# EAGLE board TLC5928_Breakout_Board (EAGLE 6.3)
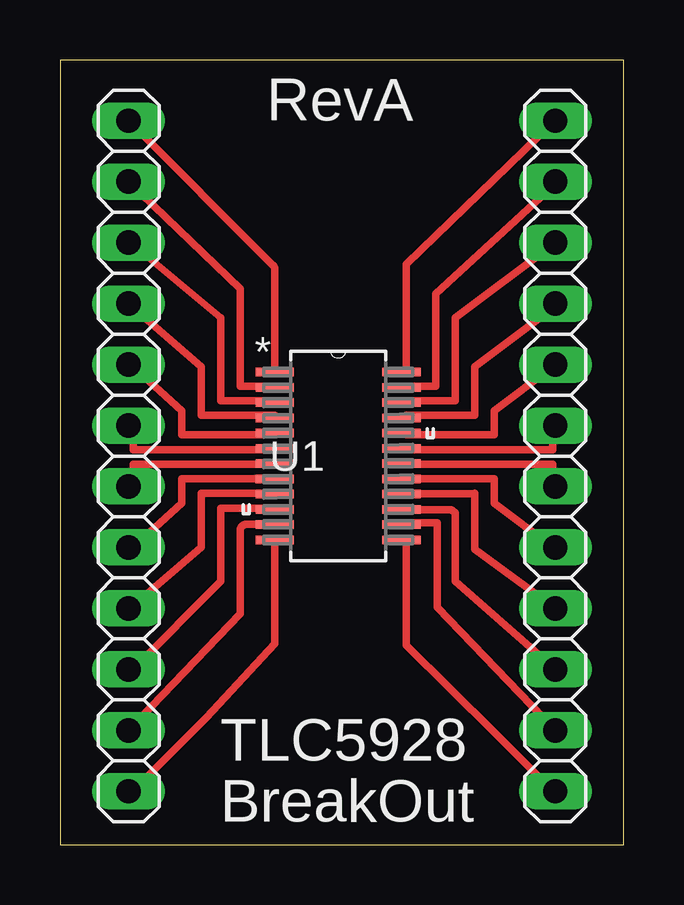
[diagram p0: board, top side]

Size 23.48 x 32.69 mm. Coordinates in mm from the lower left corner, seen from the top.
Outline: 0,0 23.48,0 23.48,32.69 0,32.69 0,0
Copper layers (1*16): Top 0.035mm / dielectric 1.5mm / Bottom 0.035mm
Design rules "default": minimum track width 10mil, minimum drill 24mil, track to track 8mil, track to pad 8mil, pad to pad 8mil, via to via 8mil, smd to smd 8mil, copper to edge 40mil, drill to drill 8mil, minimum pad ring 10mil, minimum via ring 8mil, stop-mask expansion 4mil, vias tented up to drill 0mil, thermal gap 10mil
Net classes: 0 default: width 0.305 mm, clearance 0.152 mm

## Footprints (pad centres in the part's own frame; a part is rotated, then mirrored left to right if it is on the bottom)
1X12 = drill 1.016 long: 1 -13.97,0; 2 -11.43,0; 3 -8.89,0; 4 -6.35,0; 5 -3.81,0; 6 -1.27,0; 7 1.27,0; 8 3.81,0; 9 6.35,0; 10 8.89,0; 11 11.43,0; 12 13.97,0
DBQ24 = smd 1.6 x 0.356: 1 -2.642,3.505; 2 -2.642,2.845; 3 -2.642,2.235; 4 -2.642,1.575; 5 -2.642,0.965; 6 -2.642,0.305; 7 -2.642,-0.305; 8 -2.642,-0.965; 9 -2.642,-1.575; 10 -2.642,-2.235; 11 -2.642,-2.845; 12 -2.642,-3.505; 13 2.642,-3.505; 14 2.642,-2.845; 15 2.642,-2.235; 16 2.642,-1.575; 17 2.642,-0.965; 18 2.642,-0.305; 19 2.642,0.305; 20 2.642,0.965; 21 2.642,1.575; 22 2.642,2.235; 23 2.642,2.845; 24 2.642,3.505

## Placement (x,y rotation side)
JP1  [1X12]  20.64,16.19 270 top
JP2  [1X12]  2.86,16.19 90 top
U1  TLC5928_DBQ_24  [DBQ24]  11.59,16.19 0 top

## Library data of the parts
JP1 JP2 = pinhead
U1 = Imported; DATASHEETURL: http://www.ti.com/lit/gpn/TLC5928; DESCRIPTION: 16 Channel Constant Current LED Driver with LED Open Detection; FAMILY_NAME: LED DRIVER; GENERIC_PART_NUMBER: TLC5928; INDUSTRY_STD_PKG_TYPE: SSOP/QSOP; MANUFACTURER: Texas Instruments; MANUFACTURER_PART_NUMBER: tlc5928_dbq_24; PACKAGE_DESIGNATOR: DBQ; PIN_COUNT: 24; VENDOR: Texas Instruments

## Nets
N$1: JP1.1 U1.24
N$2: JP1.2 U1.23
N$3: JP1.3 U1.22
N$4: JP1.4 U1.21
N$5: JP1.5 U1.20
N$6: JP1.6 U1.19
N$7: JP1.7 U1.18
N$8: JP1.8 U1.17
N$9: JP1.9 U1.16
N$10: JP1.10 U1.15
N$11: JP1.11 U1.14
N$12: JP1.12 U1.13
N$13: JP2.1 U1.12
N$14: JP2.2 U1.11
N$15: JP2.3 U1.10
N$16: JP2.4 U1.9
N$17: JP2.5 U1.8
N$18: JP2.6 U1.7
N$19: JP2.7 U1.6
N$20: JP2.8 U1.5
N$21: JP2.9 U1.4
N$22: JP2.10 U1.3
N$23: JP2.11 U1.2
N$24: JP2.12 U1.1

## Tracks (layer width: path | path; a pad name or v marks a point on that pad's centre or on a via)
N$1
  Top 0.305: U1.24 14.43,19.71 14.43,24.18 20.52,30.07 JP1.1
N$2
  Top 0.305: U1.23 14.43,19.1 15.65,19.1 15.65,22.96 20.52,27.43 JP1.2
N$3
  Top 0.305: U1.22 14.43,18.49 16.46,18.49 16.46,21.95 20.52,24.99 JP1.3
N$4
  Top 0.305: U1.21 14.43,17.88 17.27,17.88 17.27,19.91 20.52,22.35 JP1.4
N$5
  Top 0.305: U1.20 14.43,17.07 18.09,17.07 18.09,18.09 20.52,19.91 JP1.5
N$6
  Top 0.305: U1.19 14.43,16.46 20.52,16.46 20.52,17.27 JP1.6
N$7
  Top 0.305: U1.18 14.43,15.85 20.52,15.85 20.52,15.04 JP1.7
N$8
  Top 0.305: U1.17 14.43,15.24 18.09,15.24 18.09,14.22 20.52,12.39 JP1.8
N$9
  Top 0.305: U1.16 17.24,14.62 arc45 17.27,14.63 17.27,12.3 JP1.9
N$10
  Top 0.305: U1.15 16.21,13.96 arc-45 16.39,13.88 16.46,13.82 16.46,10.98 JP1.10
N$11
  Top 0.305: JP1.11 15.72,9.88 15.72,13.41 14.43,13.41 U1.14
N$12
  Top 0.305: U1.13 14.43,12.6 14.43,8.31 18.09,4.67 20.52,2.23 JP1.12
N$13
  Top 0.305: U1.12 8.94,12.6 8.95,8.37 6.1,5.28 3.05,2.23 JP2.1
N$14
  Top 0.305: JP2.2 7.51,9.61 7.51,13.09 arc-90 7.76,13.35 U1.11
N$15
  Top 0.305: U1.10 8.94,14.02 6.71,14.02 6.71,10.97 3.05,7.32 JP2.3
N$16
  Top 0.305: U1.9 5.89,14.63 5.89,12.39 3.05,9.96 JP2.4
N$17
  Top 0.305: U1.8 5.08,15.24 5.08,14.22 3.05,12.39 JP2.5
N$18
  Top 0.305: U1.7 8.94,15.85 3.05,15.85 3.05,15.04 JP2.6
N$19
  Top 0.305: U1.6 8.94,16.46 3.05,16.46 3.05,17.27 JP2.7
N$20
  Top 0.305: U1.5 8.94,17.07 5.08,17.07 5.08,18.09 3.05,19.91 JP2.8
N$21
  Top 0.305: JP2.9 5.89,19.91 5.89,17.88 8.94,17.88 U1.4
N$22
  Top 0.305: U1.3 8.94,18.49 6.71,18.49 6.71,21.95 3.05,24.99 JP2.10
N$23
  Top 0.305: JP2.11 7.52,23.16 7.52,19.1 8.94,19.1 U1.2
N$24
  Top 0.305: JP2.12 8.87,24.15 arc-45 8.95,23.97 U1.1

## Text on the board
tPlace: RevA | TLC5928 | BreakOut